# Altium PCB PCB1.PcbDoc
Units mm, origin at the board's own origin, x right, y up, seen from the top; angles counter-clockwise.
Board outline 120 x 120 mm, 2 copper layers (Top Layer, Bottom Layer); 100 components, 54 nets, 299 pads, 75 vias.
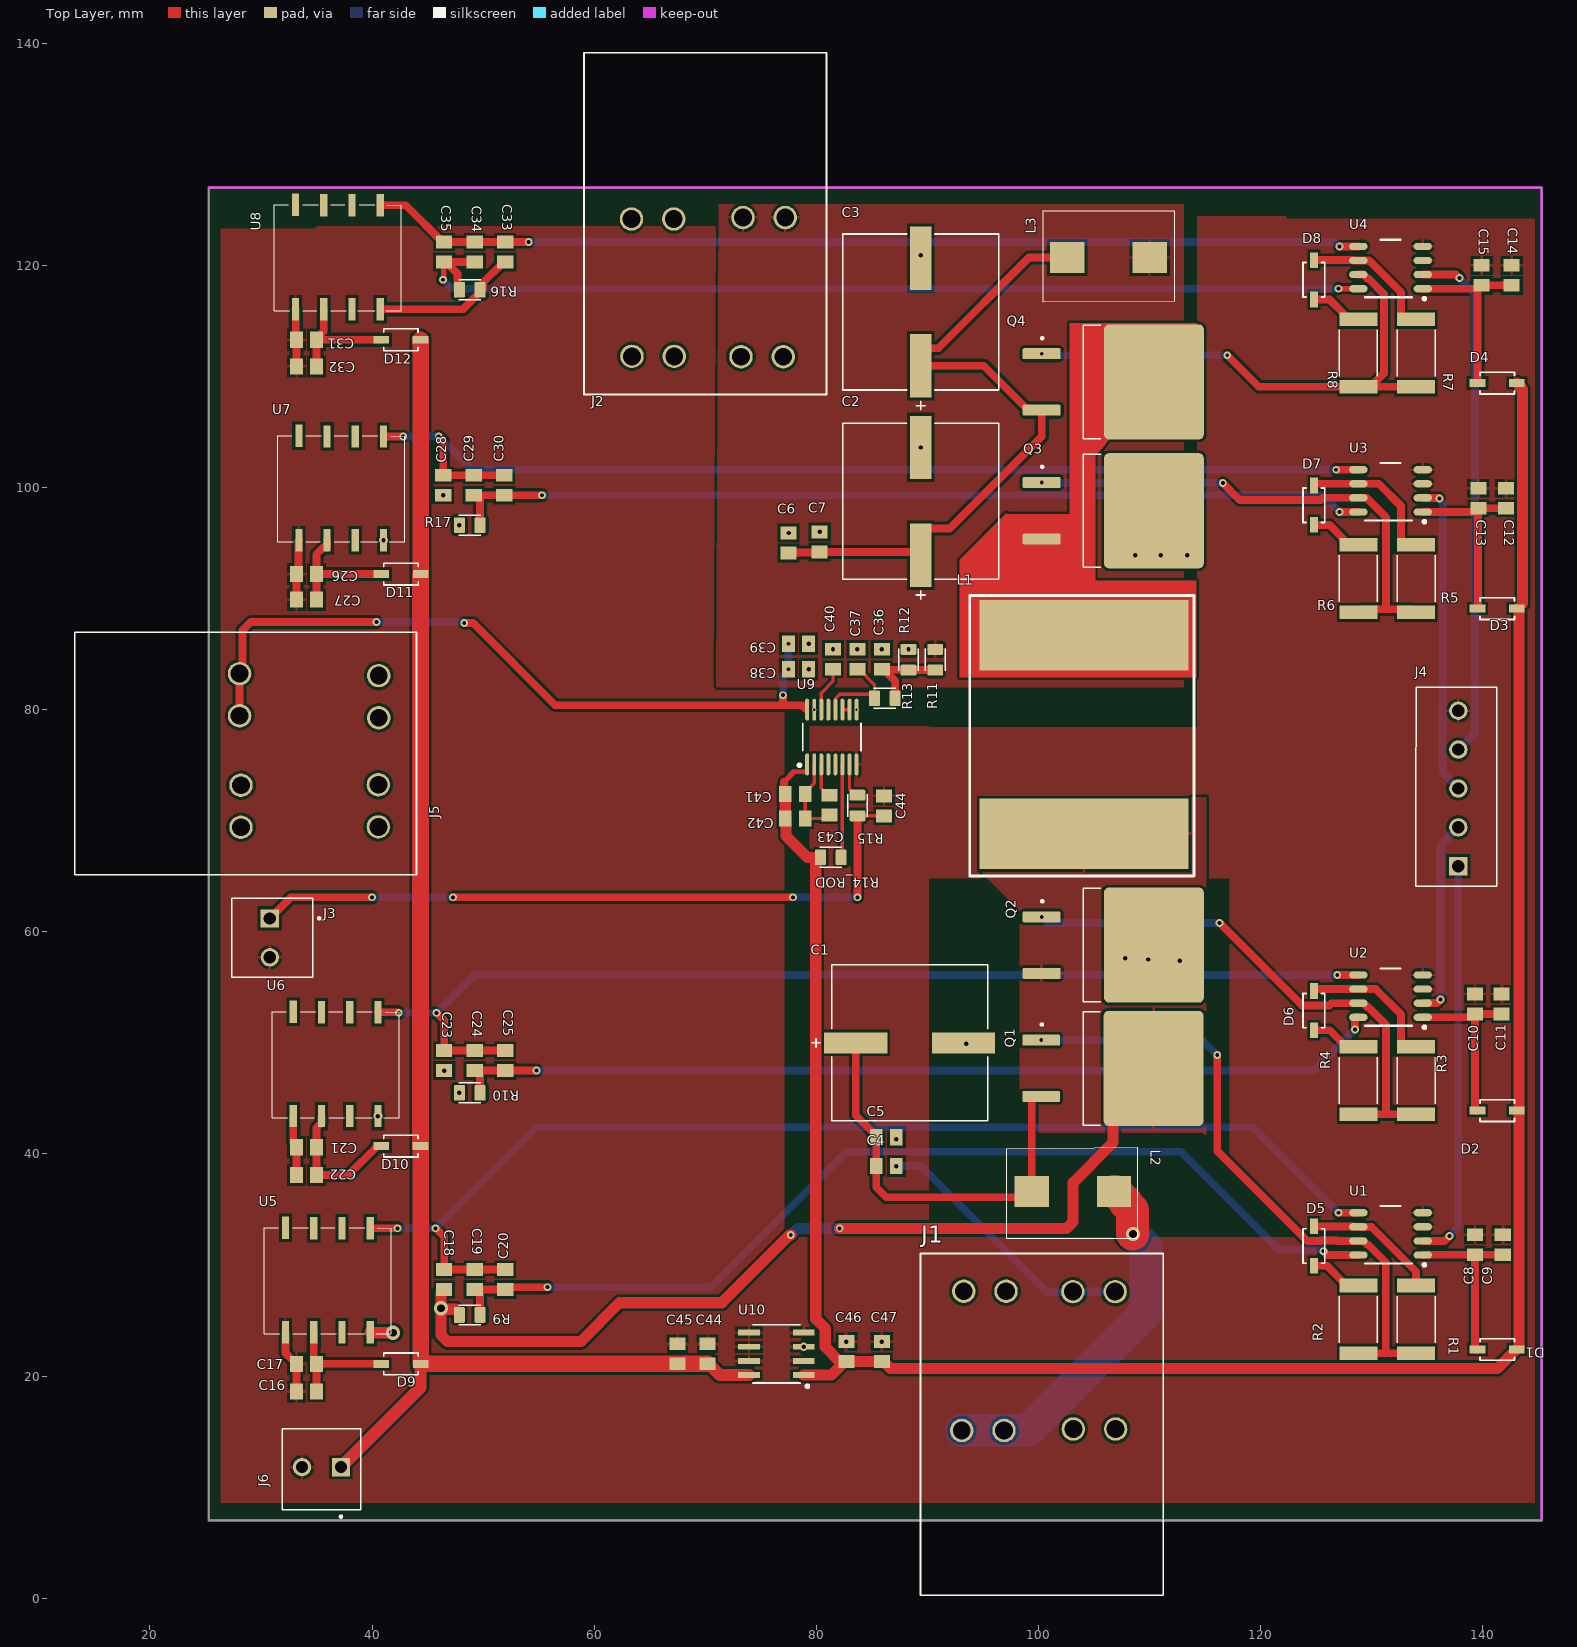
[diagram p0: Top Layer view]
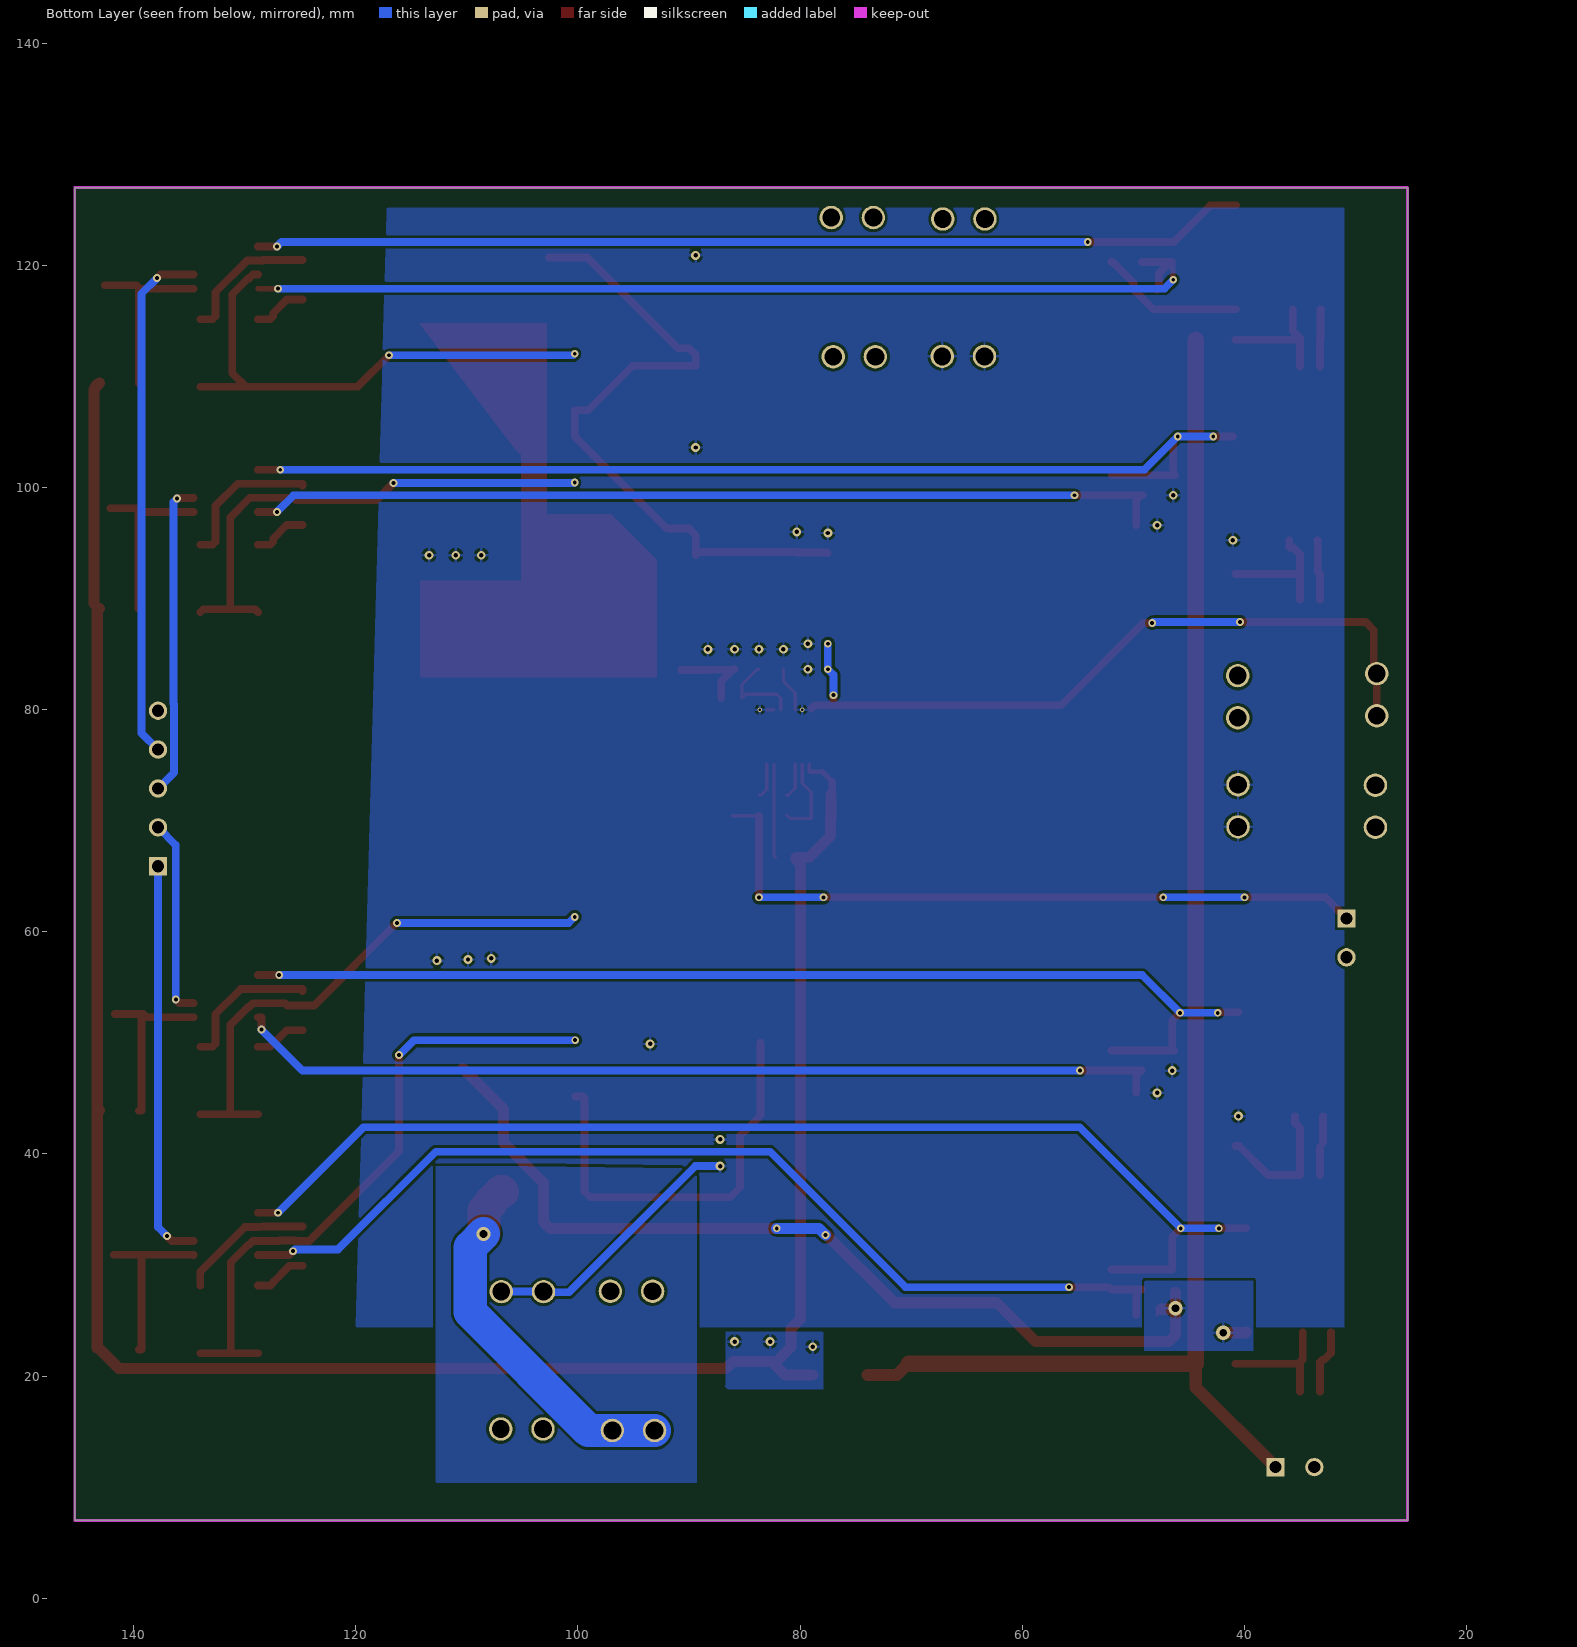
[diagram p1: Bottom Layer view, seen from below]
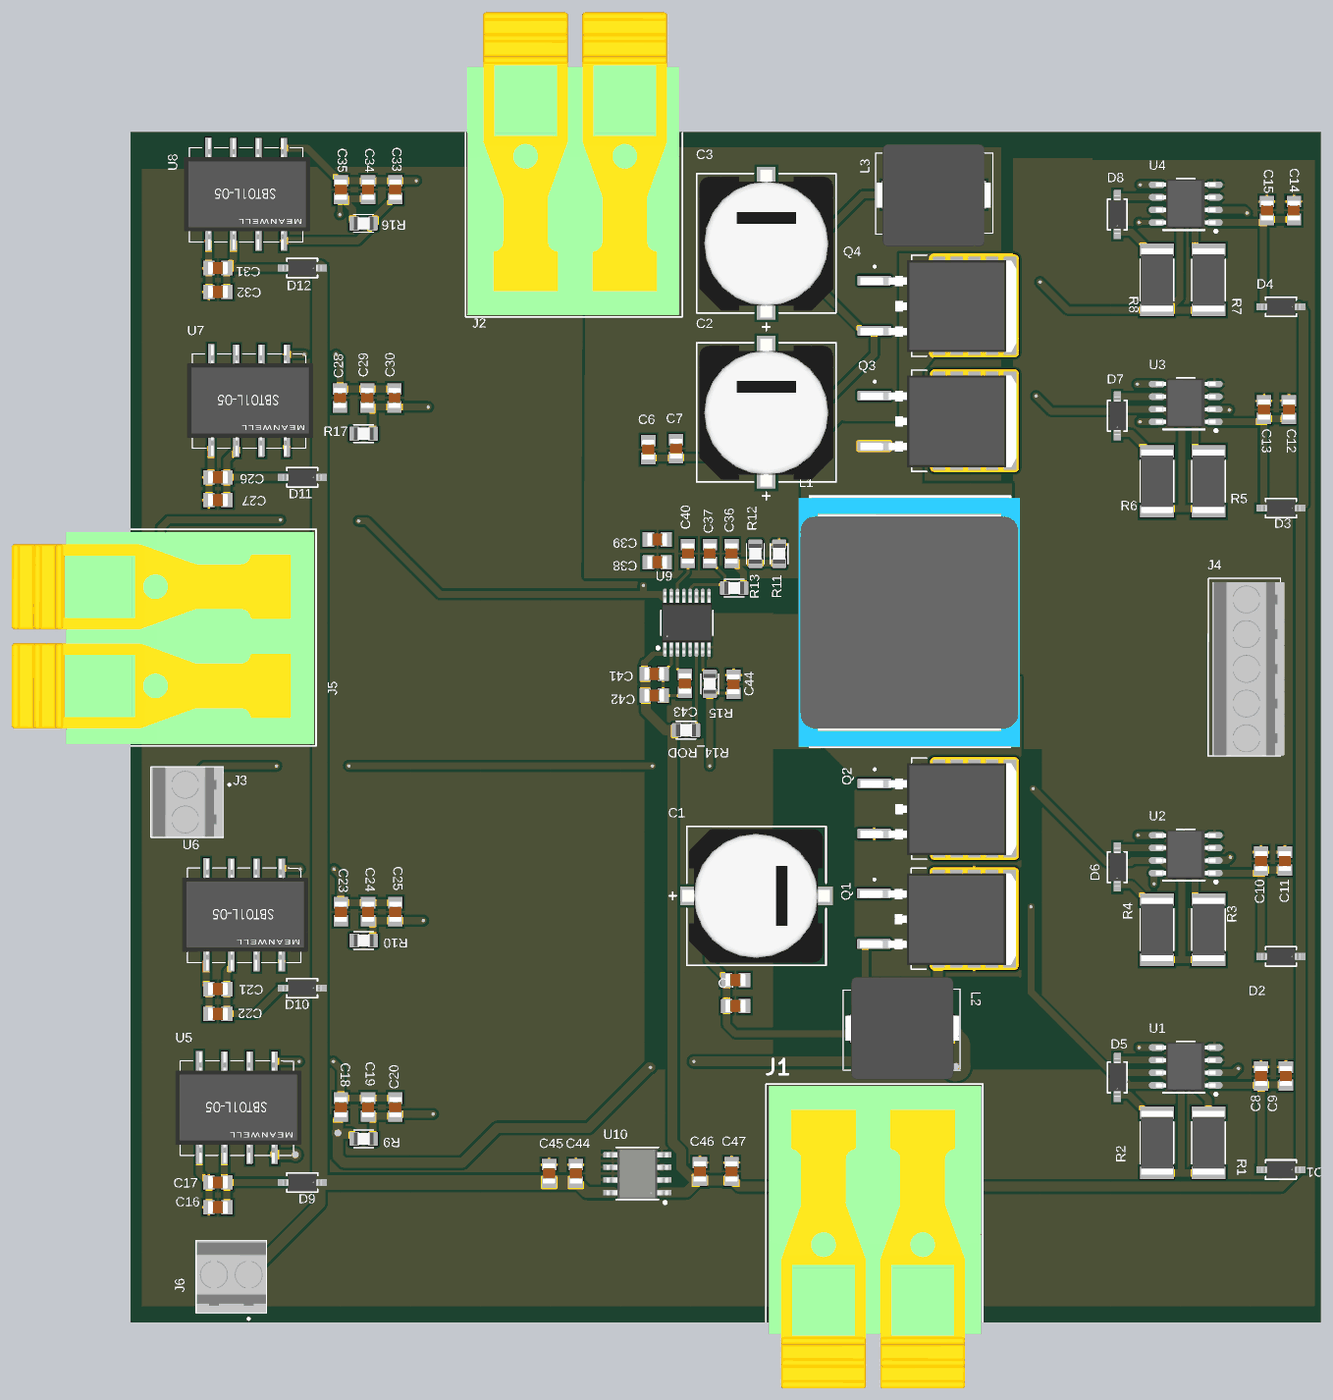
[diagram p2: 3D render of the assembled board from above, using the file's embedded part models]

## Layer stack, top to bottom
Top Solder: solder mask 0.0102, Solder Resist, Dk 3.5
Top Layer: signal copper 0.0356
Dielectric 1: dielectric 0.32, FR-4, Dk 4.8
Bottom Layer: signal copper 0.0356
Bottom Solder: solder mask 0.0102, Solder Resist, Dk 3.5

## Board outline
25.3,7 25.3,127 145.3,127 145.3,7

## Design rules (kind name [scope] priority, off if disabled: settings)
Clearance [All] p1: gap=0.254 ignorepadtopadclearanceinfootprint=FALSE except(0: Arc-Hole Track-Hole SMDPad-Hole THPad-Hole Via-Hole Fill-Hole Poly-Hole Region-Hole Text-Hole)
ComponentClearance [All] p1: gap=0.254 collisioncheckmode=3 verticalgap=0 showdistances=FALSE
Height [All] p1: minheight=0 maxheight=508 prefheight=12.7
PolygonConnect [All] p1: connectstyle=Relief reliefconductorwidth=0.254 reliefentries=4 polygonreliefangle="90 Angle" airgapwidth=0.254
RoutingVias [All] p1: holewidth=0.711 width=1.27 viastyle="Through Hole" minholewidth=0.1 minwidth=0.3 maxholewidth=0.711 maxwidth=1.27
SolderMaskExpansion [All] p1: expansion=0.103 istentingtop=FALSE
Width [All] p1: maxlimit=3 minlimit=0.3 preferedwidth=0.7 bottomlayer_minwidth=0.7 minimp=50.000000 maximp=50.000000 favimp=50.000000
28 further rules are at their usual default settings.

## Classes and differential pairs
component class Sheet2: C26 C27 C28 C29 C30 C31 C32 C33 C34 C35 C36 C37 C38 C39 C40 C41 C42 C43 C44 C45 C46 C47 D11 D12 J1 J2 J3 J4 J5 J6 R11 R12 R13 R14_ROD R15 R16 R17 U7 U8 U9 U10
component class Sheet1: C1 C2 C3 C4 C5 C6 C7 C8 C9 C10 C11 C12 C13 C14 C15 C16 C17 C18 C19 C20 C21 C22 C23 C24 C25 D1 D2 D3 D4 D5 D6 D7 D8 D9 D10 L1 L2 L3 Q1 Q2 Q3 Q4 R1 R2 R3 R4 R5 R6 R7 R8 R9 R10 U1 U2 U3 U4 U5 U6

## Components (designator, comment, footprint, x,y, rotation, side; value= is the part's Value field where it differs from the comment)
C1 "UUJ2A680MNQ1MS" UUJ2A680MNQ1MS 88.4,50 r0 top
C2 "68µF 100V" UUJ2A680MNQ1MS 89.4,98.754 r90 top
C3 "68µF 100V" UUJ2A680MNQ1MS 89.4,115.8 r90 top
C4 "0805" "0805 CAPACITOR" 86.3,38.9 r0 top
C5 "0805" "0805 CAPACITOR" 86.3,41.5 r180 top
C6 "0805" "0805 CAPACITOR" 77.5,95 r90 top
C7 "0805" "0805 CAPACITOR" 80.3,95.1 r270 top
C8 "0805" "0805 CAPACITOR" 139.3,31.829 r270 top
C9 "0805" "0805 CAPACITOR" 141.8,31.829 r270 top
C10 "0805" "0805 CAPACITOR" 139.3,53.5 r270 top
C11 "0805" "0805 CAPACITOR" 141.7,53.5 r270 top
C12 "0805" "0805 CAPACITOR" 142.1,99.029 r270 top
C13 "0805" "0805 CAPACITOR" 139.6,99.029 r270 top
C14 "0805" "0805 CAPACITOR" 142.6,119.1 r270 top
C15 "0805" "0805 CAPACITOR" 139.9,119.1 r270 top
C16 "0805" "0805 CAPACITOR" 34.093,18.6 r180 top
C17 "0805" "0805 CAPACITOR" 34.093,21.1 r0 top
C18 "0805" "0805 CAPACITOR" 46.493,28.7 r90 top
C19 "0805" "0805 CAPACITOR" 49.243,28.7 r90 top
C20 "0805" "0805 CAPACITOR" 51.993,28.7 r90 top
C21 "0805" "0805 CAPACITOR" 34.093,40.6 r180 top
C22 "0805" "0805 CAPACITOR" 34.093,38.1 r0 top
C23 "0805" "0805 CAPACITOR" 46.493,48.4 r90 top
C24 "0805" "0805 CAPACITOR" 49.243,48.4 r90 top
C25 "0805" "0805 CAPACITOR" 51.993,48.4 r90 top
C26 "0805" "0805 CAPACITOR" 34.093,92.2 r180 top
C27 "0805" "0805 CAPACITOR" 34.093,89.9 r0 top
C28 "0805" "0805 CAPACITOR" 46.407,100.2 r90 top
C29 "0805" "0805 CAPACITOR" 49.157,100.2 r90 top
C30 "0805" "0805 CAPACITOR" 51.907,100.2 r90 top
C31 "0805" "0805 CAPACITOR" 34.093,113.3 r0 top
C32 "0805" "0805 CAPACITOR" 34.093,110.9 r0 top
C33 "0805" "0805 CAPACITOR" 51.993,121.2 r90 top
C34 "0805" "0805 CAPACITOR" 49.243,121.2 r90 top
C35 "0805" "0805 CAPACITOR" 46.493,121.2 r90 top
C36 "0805" "0805 CAPACITOR" 85.9,84.532 r270 top
C37 "0805" "0805 CAPACITOR" 83.7,84.532 r270 top
C38 "0805" "0805 CAPACITOR" 78.4,83.632 r180 top
C39 "0805" "0805 CAPACITOR" 78.4,85.932 r180 top
C40 "0805" "0805 CAPACITOR" 81.5,84.532 r90 top
C41 "0805" "0805 CAPACITOR" 78.1,72.4 r180 top
C42 "0805" "0805 CAPACITOR" 78.1,70.2 r180 top
C43 "0805" "0805 CAPACITOR" 81.2,71.4 r270 top
C44 "0805" "0805 CAPACITOR" 86.1,71.332 r270 top
C44 "0805" "0805 CAPACITOR" 70.2,22 r270 top
C45 "0805" "0805 CAPACITOR" 67.5,22 r270 top
C46 "0805" "0805 CAPACITOR" 82.7,22.2 r270 top
C47 "0805" "0805 CAPACITOR" 85.9,22.2 r270 top
D1 "1N5819HW-7-F" 1N5819HW-7-F_DIO-M 141.3,22.393 r180 top
D2 "1N5819HW-7-F" 1N5819HW-7-F_DIO-M 141.3,43.893 r180 top
D3 "1N5819HW-7-F" 1N5819HW-7-F_DIO-M 141.3,89.093 r180 top
D4 "1N5819HW-7-F" 1N5819HW-7-F_DIO-M 141.3,109.393 r180 top
D5 "1N5819HW-7-F" 1N5819HW-7-F_DIO-M 124.8,31.7 r90 top
D6 "1N5819HW-7-F" 1N5819HW-7-F_DIO-M 124.8,52.9 r90 top
D7 "1N5819HW-7-F" 1N5819HW-7-F_DIO-M 124.8,98.4 r90 top
D8 "1N5819HW-7-F" 1N5819HW-7-F_DIO-M 124.8,118.7 r90 top
D9 "1N5819HW-7-F" 1N5819HW-7-F_DIO-M 42.6,21.1 r180 top
D10 "1N5819HW-7-F" 1N5819HW-7-F_DIO-M 42.593,40.7 r180 top
D11 "1N5819HW-7-F" 1N5819HW-7-F_DIO-M 42.6,92.2 r180 top
D12 "1N5819HW-7-F" 1N5819HW-7-F_DIO-M 42.593,113.3 r180 top
J1 "1770461 CONNECTOR" ? 93.1,15.103 r0 top
J2 "1770461 CONNECTOR" ? 77.2,124.3 r180 top
J3 "3.5mm KLEMENS" "3PIN 3.5MM KLEMENS" 30.8,61.2 r270 top
J4 "5 Pinli 3.5mm KLEMENS" "5PIN 35.MM KLEMENS" 137.8,65.9 r90 top
J5 "1770461 CONNECTOR" ? 28.073,83.243 r270 top
J6 "3.5mm KLEMENS" "3PIN 3.5MM KLEMENS" 37.2,11.8 r180 top
L1 "6.8 µH" MPX1D2213L6R8 104.097,68.82 r90 top
L2 "PA1320.221NL" PA1320.221NL 106.8,36.6 r180 top
L3 "PA1320.221NL" PA1320.221NL 102.6,120.7 r0 top
Q1 "IXTA60N10T" IXTA62N15P 106.7,47.7 r270 top
Q2 "IXTA60N10T" IXTA62N15P 106.74,58.8 r270 top
Q3 "IXTA62N15P" IXTA62N15P 106.74,97.9 r270 top
Q4 "IXTA62N15P" IXTA62N15P 106.74,109.5 r270 top
R1 "2515" "2512 RESISTOR" 134,25.1 r270 top
R2 "2515" "2512 RESISTOR" 128.8,25.1 r270 top
R3 "2515" "2512 RESISTOR" 134,46.6 r270 top
R4 "2515" "2512 RESISTOR" 128.8,46.6 r270 top
R5 "2515" "2512 RESISTOR" 134,91.8 r270 top
R6 "2515" "2512 RESISTOR" 128.8,91.8 r270 top
R7 "2515" "2512 RESISTOR" 134,112.1 r270 top
R8 "2515" "2512 RESISTOR" 128.8,112.1 r270 top
R9 "0805" "0805 RESISTOR" 48.793,25.5 r0 top
R10 "0805" "0805 RESISTOR" 48.793,45.5 r0 top
R11 "0805" "0805 RESISTOR" 90.7,84.492 r270 top
R12 "0805" "0805 RESISTOR" 88.3,84.492 r90 top
R13 "0805" "0805 RESISTOR" 86.165,81.032 r0 top
R14_ROD "0805" "0805 RESISTOR" 81.3,66.7 r180 top
R15 "0805" "0805 RESISTOR" 83.7,71.372 r90 top
R16 "0805" "0805 RESISTOR" 48.793,117.8 r180 top
R17 "0805" "0805 RESISTOR" 48.793,96.6 r0 top
U1 "UCC5350MCDR" UCC5350MCDR 131.7,32.8 r180 top
U2 "UCC5350MCDR" UCC5350MCDR 131.7,54.2 r180 top
U3 "UCC5350MCDR" UCC5350MCDR 131.7,99.7 r180 top
U4 "UCC5350MCDR" UCC5350MCDR 131.7,119.8 r180 top
U5 "SBT01M-15" SBT01M-15 32.213,23.95 r90 top
U6 "SBT01M-15" SBT01M-15 32.913,43.4 r90 top
U7 "SBT01M-15" SBT01M-15 33.413,95.25 r90 top
U8 "SBT01M-15" SBT01M-15 33.113,116.05 r90 top
U9 "ADuM3190ARQZ" ADUM3190ARQZ 81.4,77.532 r90 top
U10 "L78L33ABD-TR" L78L33ABD-TR 76.4,22 r180 top

## Footprints (in the part's own frame and the unit in brackets; to place one, negate y for a bottom-side part, rotate by r counter-clockwise, add the part's x,y. Pads: shape width x height; smd on the part's side, far side on the other; paste and mask are expansions set on the pad)
1N5819HW-7-F_DIO-M [mm]
  rect 1.406x0.71 smd paste+0 mask+0: 1(-1.772,0) 2(1.772,0)
  silkscreen extent -1.55,-0.98 1.55,0.98, body extent -1.92,-0.85 1.93,0.85, height 1.35
"3PIN 3.5MM KLEMENS" [mm]
  rect 1.65x1.65 hole 1.1: 1(0,0)
  round 1.65 hole 1.1: 2(3.5,0)
  silkscreen extent -1.8,-3.45 5.3,4.55, body extent -1.75,-3.45 5.25,3.85, height 9.1
"5PIN 35.MM KLEMENS" [mm]
  rect 1.65x1.65 hole 1.1: 1(0,0)
  round 1.65 hole 1.1: 2(3.5,0) 3(7,0) 4(10.5,0) 5(14,0)
  silkscreen extent -1.8,-3.45 16.13,3.85, body extent -1.77,-3.87 15.74,3.43, height 9.1
"0805 CAPACITOR" [mm]
  rect 1.15x1.45 smd: 1(-0.9,0) 2(0.9,0)
  body extent -1,-0.63 1,0.63, height 0.94
"0805 RESISTOR" [mm]
  rrect25% 1x1.42 smd: 1(-0.935,0) 2(0.935,0)
  silkscreen extent -1,-0.89 1,0.89, body extent -1,-0.63 1,0.63, height 0.43
"2512 RESISTOR" [mm]
  rect 1.24x3.42 smd: 1(-3.04,0) 2(3.04,0)
  silkscreen extent -2.1,-1.7 2.1,1.7, body extent -3.2,-1.6 3.2,1.6, height 0.7
ADUM3190ARQZ [mil]
  oval 77.56x13.97 smd paste+0 mask+0: 1(-97,87.5) 2(-97,62.5) 3(-97,37.5) 4(-97,12.5) 5(-97,-12.5) 6(-97,-37.5) 7(-97,-62.5) 8(-97,-87.5) 9(97,-87.5) 10(97,-62.5) 11(97,-37.5) 12(97,-12.5) 13(97,12.5) 14(97,37.5) 15(97,62.5) 16(97,87.5)
  silkscreen extent -105,-104 49,120, body extent -122,-99 122,99, height 69
IXTA62N15P [mm]
  rrect25% 0.99x3.42 smd: 1(-2.54,-6.45) 2(2.54,-6.45)
  rrect10% 10.37x8.99 smd paste-6: 3(0,3.66)
  silkscreen extent -5.1,-6.5 5.1,-1.15, body extent -4.57,-7.87 4.68,7.87, height 4.4
L78L33ABD-TR [mm]
  rect 1.97x0.533 smd paste+0 mask+0: 1(-2.464,1.905) 2(-2.464,0.635) 3(-2.464,-0.635) 4(-2.464,-1.905) 5(2.464,-1.905) 6(2.464,-0.635) 7(2.464,0.635) 8(2.464,1.905)
  silkscreen extent -2.92,-2.63 2.13,3.05, body extent -3.1,-2.46 3.1,2.54, height 1.76
MPX1D2213L6R8 [mm]
  rect 6.38x18.8 smd: 1(0,0) 2(17.88,0)
  silkscreen extent -3.81,-9.91 21.46,10.29, body extent -3.8,-10.9 21.28,11.43, height 14.6
PA1320.221NL [mm]
  rect 3.1x2.8 smd: 1(0,0) 2(7.4,0)
  silkscreen extent -2.16,-4 9.65,4.19, body extent -2.07,-5.21 9.43,5.09, height 4
SBT01M-15 [mm]
  rect 2x0.65 smd: 1(0,0) 2(0,-2.54) 3(0,-5.08) 4(0,-7.62) 5(9.35,-7.62) 6(9.35,-5.08) 7(9.35,-2.54) 8(9.398,0)
  silkscreen extent -0.13,-9.53 9.4,1.91, body extent -0.9,-10.29 10.3,2.41, height 6.33
UCC5350MCDR [mm]
  oval 1.65x0.65 smd paste+0 mask+0: 1(-2.9,1.905) 2(-2.9,0.635) 3(-2.9,-0.635) 4(-2.9,-1.905) 5(2.9,-1.905) 6(2.9,-0.635) 7(2.9,0.635) 8(2.9,1.905)
  silkscreen extent -3.18,-2.5 2.29,2.92, body extent -3.01,-2.45 3.01,2.45, height 1.63
UUJ2A680MNQ1MS [mm]
  rect 5.704x1.897 smd paste+0 mask+0: 1(-4.846,0) 2(4.846,0)
  silkscreen extent -8.82,-7.02 7.02,7.02, body extent -7.49,-6.75 7.41,6.75, height 13.8
? [mil]
  round 83 hole 63 mask+0: 1(0,0) 2(149.61,0) 3(393.7,492) 3(393.7,492) 4(543.31,492) 4(543.31,492) ""(7.09,493.04) ""(156.69,493.04) ""(395.39,5) ""(545,5)
  silkscreen extent -147,-584 713,627, body extent -135,-582 708,619, height 1181

## Part data
C1: "68µF 100V Aluminum Electrolytic Capacitors"
C2 C3: library part UUJ2A680MNQ1MS, "68µF 100V Aluminum Electrolytic Capacitors"
C4 C6: library part 0805CAP, "1UF 100V CAP CER  X7S 0805"
C5 C7 C38 C39 C40 C41 C42 C43 C44 C44 C45 C46 C47: library part 0805CAP_1, "0.1UF 100V CAP CER X5R 0402"
C8 C9 C10 C11 C12 C13 C14 C15 C16 C17 C18 C19 C20 C21 C22 C23 C24 C25 C26 C27 C28 C29 C30 C31 C32 C33 C34 C35 C36 C37: library part "0805 CAPACITANCE", "4.7UF 100V CAP CER  X7S 0805"
D1 D2 D3 D4 D5 D6 D7 D8 D9 D10 D11 D12: "40V 1A DIODE SCHOTTKY"
J1 J2 J5: "TERM BLK 2P SIDE ENTRY"
L1: library part "6.8 µH Shielded Wirewound Inductor", "6.8UH 39A 3.3 MOHM SMD"
Q1 Q2: "N-Channel 100 V 60A (Tc) 176W (Tc) Surface Mount TO-263AA"
Q3 Q4: "N-Channel 150 V 62A (Tc) 350W (Tc) Surface Mount TO-263AA"
R1 R2 R3 R4 R5 R6 R7 R8: library part "2515 RESISTOR", "10 OHM RES SMD 10 OHM 5% 1W 2512"
R9 R10 R11 R12 R13 R14_ROD R15 R16 R17: library part "0805 RESISTOR", "1K OHM 16V"
U1 U2 U3 U4: "No Description Available"
U9: "IC ISOLATOR 16QSOP"
U10: "IC REG LINEAR 3.3V 100MA 8SO"

## Via types
v1: diameter 0.7, hole 0.35, Top Layer to Bottom Layer, tented both sides, 42 vias
v2: diameter 0.8, hole 0.4, Top Layer to Bottom Layer, tented both sides, 28 vias
v3: diameter 1.27, hole 0.711, Top Layer to Bottom Layer, tented both sides, 3 vias
v4: diameter 0.4, hole 0.2, Top Layer to Bottom Layer, tented both sides, 2 vias

## Nets (pads, with @x,y where several pads share a name; then routed paths per layer and width w, separated by ;. In a path a pad name is that pad's centre, name@x,y a point inside that pad or via, vN(x,y) a via of type N, cw(c..) or ccw(c..) an arc to the next point about the centre after c; other vN are vias at no path point)
3V3: C41.2 C42.2 C46.2 C47.2 D1.1 D2.1 D3.1 D4.1 R14_ROD.2 U9.1 U10.1 | length 211
  Top Layer w0.3: C41.2@77.1,72.5 C41.2 ; U9.1@79.152,74.41 79.177,74.435 U9.1
  Top Layer w0.4: 78.01,74.41 U9.1@79.152,74.41
  Top Layer w0.5: 77.1,73.5 78.01,74.41
  Top Layer w0.7: C41.2@77.1,72.5 77.1,73.5
  Top Layer w1: C41.2 C42.2 77.275,70.125 77.275,68.625 79.2,66.7 R14_ROD.2 80.365,66.49 79.948,66.073 79.948,25.138 80.805,24.281 80.805,22.628 C46.2@82.059,21.375 ; U10.1 81.349,20.095 82.475,21.221 82.475,21.225 82.55,21.3 C46.2 C47.2 86.05,21.3 86.664,20.686 141.307,20.686 143.014,22.393 143.159,22.538 143.275,22.538 143.275,22.974 143.279,22.978 D2.1@143.279,43.743 ; D2.1 143.217,44.038 143.275,44.038 143.275,88.947 143.217,88.947 D3.1 ; D4.1 143.217,109.247 143.275,109.247 143.42,109.102 143.42,108.966 143.579,108.807 143.579,89.542
5V: C38.2 C39.2 J5.1 J5.2 U9.16 | length 67.8
  Top Layer w0.7: J5.2 J5.1 28.342,83.512 28.342,87.142 29.1,87.9 v1(40.4,87.9) ; v1(48.3,87.8) 49.1,87.8 56.5,80.4 77,80.4 ; v1(77,81.3) 77,80.4 ; 79,80.1 78.7,80.4 77,80.4
  Bottom Layer w0.7: v1(40.4,87.9) 48.2,87.9 v1(48.3,87.8) ; v1(77,81.3) 77,83.132 v1(77.5,83.632) v1(77.5,85.932)
12V: C44.2@70.2,21.1 C45.2 D9.1 D10.1 D11.1 D12.1 J6.1 U10.8 | length 134.5
  Top Layer w1.1: J6.1 44.372,18.972 D9.1 ; C44.2@70.2,21.1 70.35,21.1 70.375,21.075 70.375,21.021 71.301,20.095 U10.8
  Top Layer w1.5: D12.1 44.372,113.293 D11.1 44.365,92.193 D10.1 44.372,40.693 D9.1 C45.2 C44.2@70.2,21.1
G1: Q1.1 R1.2 R2.2 U1.7 | length 57.5
  Top Layer w0.7: v1(116.1,48.9) 116.1,40.26 124.195,32.165 125.405,32.165 125.439,32.198 126.865,32.198 126.898,32.165 U1.7 129.25,32.165 129.591,31.824 129.685,31.824 131.26,30.249 131.26,22.33 ; R2.2 R1.2
  Bottom Layer w0.7: v1(100.25,50.24) 114.76,50.24 v1(116.1,48.9)
G2: Q2.1 R3.2 R4.2 U2.7 | length 48.5
  Top Layer w0.7: v1(116.3,60.8) 123.735,53.365 126.16,53.365 126.36,53.565 U2.7 129.25,53.565 129.591,53.224 129.685,53.224 131.3,51.609 131.3,43.56 ; R4.2 R3.2
  Bottom Layer w0.7: v1(100.29,61.34) 100.83,60.8 v1(116.3,60.8)
G3: Q3.1 R5.2 R6.2 U3.7 | length 46.2
  Top Layer w0.7: v1(116.6,100.4) 118.135,98.865 125.405,98.865 125.605,99.065 U3.7 129.535,99.065 131.3,97.3 131.3,89.21 131.12,89.03 ; R6.2 129.07,89.03 131.12,89.03 ; R5.2 133.73,89.03 131.12,89.03
  Bottom Layer w0.7: v1(100.29,100.44) 100.33,100.4 v1(116.6,100.4)
G4: Q4.1 R7.2 R8.2 U4.7 | length 46.8
  Top Layer w0.7: v1(117,111.9) 119.84,109.06 R8.2 R8.2@129.89,109.06 ; U4.7 129.25,119.165 129.591,118.824 129.685,118.824 131.114,117.395 131.114,110.284 R8.2@129.89,109.06 ; R7.2 R8.2@129.89,109.06
  Bottom Layer w0.7: v1(100.29,112.04) 100.43,111.9 v1(117,111.9)
GND: C1.2 C2.2 C3.2 C4.2 C5.1 C6.2 C7.1 C23.1 C28.1 C36.1 C37.1 C38.1 C39.1 C40.2 J1.3 J1.4 J2.3 J2.4 J5.3 J5.4 Q2.3 Q3.3 R10.1 R12.2 R17.1 U6.4 U7.4 U9.9 U9.15 | length 24.4
  Bottom Layer w0.7: v2(87.2,38.9) 89.441,38.9 100.805,27.536 103.036,27.536 103.1,27.6 J1.4@106.9,27.6
  other v2: 87.2,41.3 40.533,43.4 47.858,45.5 46.493,47.5 93.5,49.9 112.7,57.4 109.9,57.5 107.8,57.6 79.3,83.632 81.5,85.432 83.7,85.432 85.9,85.432 88.3,85.427 79.3,85.932 108.7,93.9 111,93.9 113.4,93.9 41.033,95.25 77.5,95.9 80.3,96 47.858,96.6 46.407,99.3 89.4,103.6 89.4,120.9
  other v4: 79.812,79.995 83.622,79.995
NetC1_1: C1.1 C4.1 C5.2 L2.2 Q1.2 | length 37.7
  Top Layer w0.7: C1.1 83.554,43.496 85.4,41.65 C5.2 C4.1 85.4,37 86.3,36.1 98.9,36.1 L2.2 99.4,45.015 99.545,45.16 Q1.2
NetC2_1: C2.1 C3.1 C6.1 C7.2 L3.1 Q4.2 | length 61.2
  Top Layer w0.7: C6.1 77.55,94.15 80.25,94.15 C7.2 89.108,94.2 C2.1 89.4,95.702 89.998,96.3 92,96.3 100.29,104.59 Q4.2 99.075,106.96 95.081,110.954 C3.1 89.4,111.944 89.998,112.543 90.988,112.543 99.146,120.7 L3.1
NetC8_2: C8.2 C9.2 D1.2 U1.1 | length 16
  Top Layer w0.7: U1.1 134.617,30.912 139.283,30.912 C8.2 ; D1.2 139.305,22.393 139.3,22.397 C8.2 ; C9.2 C8.2
NetC10_2: C10.2 C11.2 D2.2 U2.1 | length 16.2
  Top Layer w0.7: U2.1 138.845,52.295 139.15,52.6 C10.2 ; D2.2 139.305,43.893 139.3,43.897 C10.2 ; C11.2 C10.2
NetC12_2: C12.2 C13.2 D3.2 U3.1 | length 16.7
  Top Layer w0.7: U3.1 139.116,97.795 139.45,98.129 C13.2 ; D3.2 139.559,89.093 139.564,89.097 139.564,98.093 C13.2 ; C12.2 C13.2
NetC14_2: C14.2 C15.2 D4.2 U4.1 | length 17
  Top Layer w0.7: U4.1 139.445,117.895 139.75,118.2 C15.2@139.753,118.2 ; D4.2 139.528,117.975 C15.2@139.753,118.2 ; C14.2 C15.2 C15.2@139.753,118.2
NetC16_1: C16.1 C17.2 D9.2 U5.2 | length 11.3
  Top Layer w0.7: U5.2 34.753,21.49 34.993,21.25 C17.2 ; C16.1 C17.2 ; D9.2 C17.2
NetC21_1: C21.1 C22.2 D10.2 U6.2 | length 12.4
  Top Layer w0.7: U6.2 35.453,42.775 35.428,42.75 35.403,42.75 34.993,42.34 C21.1 C22.2 37.873,38.1 40.473,40.7 D10.2
NetC21_2: C21.2 C22.1 U6.1 | length 4.9
  Top Layer w0.7: C21.2@32.913,41.03 U6.1 ; C22.1 C21.2
NetC26_1: C26.1 C27.2 D11.2 U7.2 | length 11.8
  Top Layer w0.7: C27.2 C26.1 ; U7.2 35.953,94.625 35.928,94.6 35.618,94.6 34.993,93.975 C26.1 ; D11.2 C26.1
NetC31_2: C31.2 C32.2 D12.2 U8.2 | length 11.3
  Top Layer w0.7: C32.2 C31.2 ; U8.2 35.653,114.085 35.243,113.675 35.218,113.675 34.993,113.45 C31.2 ; D12.2 C31.2
NetC33_1: C33.1 R16.1 U8.4 | length 13.4
  Top Layer w0.7: U8.4 48.188,116.05 49.978,117.84 49.978,118.435 51.843,120.3 C33.1
NetC36_2: C36.2 R11.2 R12.1 R13.2 | length 7.8
  Top Layer w0.7: C36.2 86.05,83.632 C36.2@86.087,83.594 ; R13.2 87.1,82.582 C36.2@86.087,83.594 ; R11.2 R12.1 88.262,83.594 C36.2@86.087,83.594
NetC40_1: C40.1 U9.14 | length 4.1
  Top Layer w0.3: U9.14 80.447,81.486 81.5,82.538 C40.1
NetC41_1: C41.1 C42.1 C43.2 U9.2 | length 7.5
  Top Layer w0.3: U9.2 79.812,73.362 79,72.55 C41.1 C42.1 80.9,70.2 C43.2
NetC43_1: C43.1 U9.3 | length 3.2
  Top Layer w0.3: U9.3 80.447,72.903 81.05,72.3 C43.1
NetC44_2: C44.2@86.1,70.432 J3.1 R15.1 | length 63.4
  Top Layer w0.3: R15.1 86.095,70.437 C44.2@86.1,70.432
  Top Layer w0.7: J3.1 32.7,63.1 v1(40,63.1) ; v1(47.3,63.1) v1(77.9,63.1) ; v1(83.7,63.1) R15.1
  Bottom Layer w0.7: v1(40,63.1) v1(47.3,63.1) ; v1(77.9,63.1) v1(83.7,63.1)
NetD5_1: D5.1 R2.1 | length 4.8
  Top Layer w0.7: D5.1 125.972,29.928 127.44,28.46 127.44,28.41 127.71,28.14 R2.1
NetD5_2: D5.2 R1.1 U1.6 | length 12.1
  Top Layer w0.7: D5.2 128.313,33.472 128.35,33.435 U1.6 128.825,33.41 129.99,33.41 134,29.4 R1.1
NetD6_1: D6.1 R4.1 | length 4.6
  Top Layer w0.7: D6.1 126.222,51.128 127.71,49.64 R4.1
NetD6_2: D6.2 R3.1 U2.6 | length 13.1
  Top Layer w0.7: D6.2 124.8,54.83 124.805,54.835 130.365,54.835 132.64,52.56 132.64,49.91 132.91,49.64 R3.1
NetD7_1: D7.1 R6.1 | length 4.9
  Top Layer w0.7: D7.1 126.205,96.628 127.44,95.393 127.44,95.11 127.71,94.84 R6.1
NetD7_2: D7.2 R5.1 U3.6 | length 13.5
  Top Layer w0.7: D7.2 124.8,100.33 124.805,100.335 130.635,100.335 132.64,98.33 132.64,95.11 132.91,94.84 R5.1
NetD8_1: D8.1 R8.1 | length 4.9
  Top Layer w0.7: D8.1 126.205,116.928 127.44,115.693 127.44,115.41 127.71,115.14 R8.1
NetD8_2: D8.2 R7.1 U4.6 | length 12.7
  Top Layer w0.7: D8.2 128.313,120.472 128.35,120.435 129.765,120.435 132.64,117.56 132.64,115.41 132.91,115.14 R7.1
NetR14_ROD_1: R14_ROD.1 U9.6 | length 8.4
  Top Layer w0.3: R14_ROD.1 82.342,66.807 82.342,75.057 U9.6
NetR15_2: R15.2 U9.7 | length 3.2
  Top Layer w0.3: U9.7 82.987,72.809 83.49,72.307 R15.2
NetU9_10: U9.10 U9.11 | length 0.6
  Top Layer w0.3: U9.11 U9.10
PWM1: J4.1 U1.2 | length 36.2
  Top Layer w0.7: U1.2 136.565,32.165 v1(137,32.6)
  Bottom Layer w0.7: v1(137,32.6) 137.8,33.4 J4.1
PWM2: J4.2 U2.2 | length 17.9
  Top Layer w0.7: U2.2 134.625,53.59 135.89,53.59 v1(136.2,53.9)
  Bottom Layer w0.7: v1(136.2,53.9) 136.2,67.8 J4.2
PWM3: J4.3 U3.2 | length 28.4
  Top Layer w0.7: U3.2 134.625,99.04 136.06,99.04 v1(136.1,99)
  Bottom Layer w0.7: v1(136.1,99) 136.4,98.7 136.4,80.521 136.371,80.492 136.371,74.329 J4.3
PWM4: J4.4 U4.2 | length 47.1
  Top Layer w0.7: U4.2 137.584,119.165 v1(137.9,118.849)
  Bottom Layer w0.7: J4.4 139.3,77.9 139.3,117.449 v1(137.9,118.849)
SGND: C8.1 C9.1 C10.1 C11.1 C12.1 C13.1 C14.1 C15.1 C16.2 C17.1 C26.2 C27.1 C31.1 C32.1 C44.1 C45.1 C46.1 C47.1 J3.2 J4.5 J6.2 U1.3 U1.4 U2.3 U2.4 U3.3 U3.4 U4.3 U4.4 U5.1 U7.1 U8.1 U9.8 U10.2 U10.3 U10.4 U10.5 U10.6 U10.7 | length 16.5
  Top Layer w0.7: U5.1 32.213,22.08 32.818,21.475 32.968,21.475 33.193,21.25 C17.1 C16.2 ; U8.1 33.138,116.025 33.138,113.355 C31.1 C32.1 ; C27.1 C26.2 33.388,92.395 33.388,95.225 U7.1
  other v2: 78.864,22.635 82.7,23.1 85.9,23.1
SW1: C18.1 L1.1 Q1.3 Q2.2 R9.1 U5.4 | length 86.8
  Top Layer w0.3: v3(46.2,26.1) v3@46.282,26.018 ; C18.1@46.2,27.507 C18.1 ; R9.1@47.508,26.018 47.858,25.668 R9.1
  Top Layer w1: U5.4 39.883,23.9 v3(41.9,23.9) ; C18.1@46.2,27.507 v3(46.2,26.1) 46.2,23.686 46.786,23.1 58.8,23.1 62.3,26.6 71.5,26.6 77.6,32.7 v1(77.7,32.7) ; v3@46.282,26.018 R9.1@47.508,26.018 ; v1(82.1,33.3) 102.514,33.3 103.1,33.886 103.1,37.4 106.715,41.015 106.715,44.055 Q1.3
  Bottom Layer w1: v1(77.7,32.7) 78.3,33.3 v1(82.1,33.3)
SW2: L1.2 Q3.2 Q4.3
V0: J2.1 J2.2 L3.2 R11.1
V1: J1.1 J1.2 L2.1 | length 33.2
  Top Layer w3: L2.1 106.95,36.6 107.85,35.7 107.85,35.55 108.465,34.935 108.465,32.835 v3(108.5,32.8)
  Bottom Layer w3: J1.1 99.045,15.103 109.708,25.767 109.708,31.592 v3(108.5,32.8)
VCC_Q1: C18.2 C19.2 C20.2 U1.5 U5.5 | length 105.4
  Top Layer w0.7: U5.5 v1(42.3,33.3) ; v1(45.726,33.3) 46.493,32.533 C18.2 C19.2 C20.2 ; v1(127,34.7) 127.005,34.705 U1.5
  Bottom Layer w0.7: v1(42.3,33.3) v1(45.726,33.3) 54.826,42.4 119.3,42.4 v1(127,34.7)
VCC_Q2: C23.2 C24.2 C25.2 U2.5 U6.5 | length 99.1
  Top Layer w0.7: U6.5 42.35,52.75 v1(42.4,52.7) ; v1(45.8,52.7) 46.493,52.007 46.493,49.45 46.343,49.3 C23.2 C24.2 C25.2 ; v1(126.9,56.1) 126.905,56.105 U2.5
  Bottom Layer w0.7: v1(42.4,52.7) v1(45.8,52.7) 49.2,56.1 v1(126.9,56.1)
VCC_Q3: C28.2 C29.2 C30.2 U3.5 U7.5 | length 98.4
  Top Layer w0.7: U7.5 v1(42.8,104.6) ; v1(46,104.6) 46.407,104.193 46.407,101.25 46.257,101.1 C28.2 C29.2 C30.2 ; v1(126.8,101.6) 128.795,101.6 U3.5
  Bottom Layer w0.7: v1(42.8,104.6) v1(46,104.6) 49,101.6 v1(126.8,101.6)
VCC_Q4: C33.2 C34.2 C35.2 U4.5 U8.5 | length 89.6
  Top Layer w0.7: U8.5 43.043,125.4 46.343,122.1 C35.2 C34.2 C33.2 v1(54.1,122.1) ; v1(127.1,121.7) 128.795,121.7 U4.5
  Bottom Layer w0.7: v1(54.1,122.1) 126.7,122.1 v1(127.1,121.7)
VEE_Q1: C19.1 C20.1 R9.2 U1.8 | length 91
  Top Layer w0.7: C19.1 C19.1@49.393,27.8 ; R9.2 49.728,27.465 C19.1@49.393,27.8 ; v1(55.8,28) 52.193,28 C20.1 49.728,27.8 C19.1@49.393,27.8 ; v1(125.656,31.244) 126.005,30.895 U1.8
  Bottom Layer w0.7: v1(55.8,28) 70.5,28 82.7,40.2 112.8,40.2 121.6,31.4 125.5,31.4 v1(125.656,31.244)
VEE_Q2: C24.1 C25.1 R10.2 U2.8 | length 84.3
  Top Layer w0.7: C24.1 C24.1@49.393,47.5 ; R10.2 49.728,47.015 49.618,47.125 49.618,47.275 C24.1@49.393,47.5 ; v1(54.8,47.5) C25.1 C24.1@49.393,47.5 ; v1(128.5,51.2) 128.5,52.27 128.525,52.295 U2.8
  Bottom Layer w0.7: v1(54.8,47.5) 124.8,47.5 v1(128.5,51.2)
VEE_Q3: C29.1 C30.1 R17.2 U3.8 | length 83.1
  Top Layer w0.7: C29.1 C29.1@49.307,99.3 ; R17.2 49.728,98.879 C29.1@49.307,99.3 ; v1(55.3,99.3) C30.1 C29.1@49.307,99.3 ; v1(127.1,97.8) 128.795,97.8 U3.8
  Bottom Layer w0.7: v1(55.3,99.3) 125.6,99.3 v1(127.1,97.8)
VEE_Q4: C34.1 C35.1 R16.2 U4.8 | length 90.1
  Top Layer w0.5: v1(46.4,118.7) 46.438,118.738 46.438,120.245 C35.1 ; v1(127,117.9) 127.003,117.897 128.797,117.897 U4.8
  Top Layer w0.7: C35.1 C35.1@46.643,120.3 ; R16.2 47.683,117.975 47.683,119.26 C35.1@46.643,120.3 ; C34.1 C35.1@46.643,120.3
  Bottom Layer w0.7: v1(46.4,118.7) 47.2,117.9 v1(127,117.9)
Vmeas: C37.2 R13.1 U9.12 | length 8.1
  Top Layer w0.3: U9.12 81.728,80.006 81.728,81.001 82.112,81.384 84.88,81.384 R13.1@85.23,81.034 ; C37.2 83.85,83.632 85.23,82.252 R13.1@85.23,81.034 ; R13.1 R13.1@85.23,81.034
pads on no net: J1. J2. J5. U5.3 U5.6 U5.7 U5.8 U6.3 U6.6 U6.7 U6.8 U7.3 U7.6 U7.7 U7.8 U8.3 U8.6 U8.7 U8.8 U9.4 U9.5 U9.13

## Polygon pours and split planes (outlines as drawn)
GND on Bottom Layer "GND_L02_P004" (solid, pour order 4): 117.2,125.3 117.1,125.2 31,125.2 31,41.2 31,24.4 42.7,24.4 120,24.4
V1 on Bottom Layer "V1_L02_P002" (solid, pour order 2): 104.5,38.9 112.8,38.9 112.8,10.5 112.9,10.4 89.3,10.4 89.3,38.4 89,38.7
SGND on Bottom Layer "SGND_L02_P007" (solid, pour order 7): 77.9,24.1 78,24 86.7,24 86.7,19.2 86.8,19.1 86.5,18.8 77.9,18.8
SW1 on Bottom Layer "SW1_L02_P000" (solid, pour order 0): 39.2,28.6 48.9,28.6 49,28.5 49,22.3 39.2,22.3
SGND on Top Layer "SGND_L01_P008" (solid, pour order 8): 85.055,78.4 126.5,78.4 126.5,64.8 85,64.8 84.9,64.9
SGND on Top Layer "SGND_L01_P009" (solid, pour order 9): 122.5,73.8 122.3,74 114.3,74 114.3,124.4 122.297,124.4
SGND on Top Layer "SGND_L01_P006" (solid, pour order 6): 133,124.2 144.7,124.2 144.7,8.6 28.8,8.6 28.8,15.9 45.4,32.5 124.5,32.5 117.2,39.8 117.2,124.2
SGND on Top Layer "SGND_L01_P005" (solid, pour order 5): 34.9,123.4 34.8,123.3 26.4,123.3 26.4,8.6 36.4,8.6 36.4,18.8 36.6,19 90.1,19 90.1,78.5 79.4,78.5 79.4,28.7 77.1,31 77.1,123.5 35.1,123.5
V0 on Top Layer "V0_L01_P003" (solid, pour order 3): 71.2,125.5 113.1,125.5 113.1,81.9 113,82 71,82
SW1 on Top Layer "SW1_L01_P001" (solid, pour order 1): 94.6,72.1 115.1,72.1 115.1,41.8 115,41.7 114.8,41.9 98.3,41.9 98.3,61.9 94.6,65.6

## Keep-outs
Keep-Out Layer:
  the board outline again, w0.254

## Other copper
Top Layer:
  region net SW2: 114.3,114.8 102.8,114.8 102.8,97.6 97.2,97.6 97.1,97.7 92.9,93.5 92.9,82.9 114.2,82.9 114.2,91.6 105.1,91.6 105.1,102.9 105.7,103.5